# Altium PCB ADF_2nd_LO_board.PcbDoc
Units mm, origin at the board's own origin, x right, y up, seen from the top; angles counter-clockwise.
Board outline 50.01 x 49.63 mm, 2 copper layers (Top Layer, Bottom Layer); 28 components, 12 nets, 57 pads, 44 vias.
Unrouted connection lines stored in the file: 3.
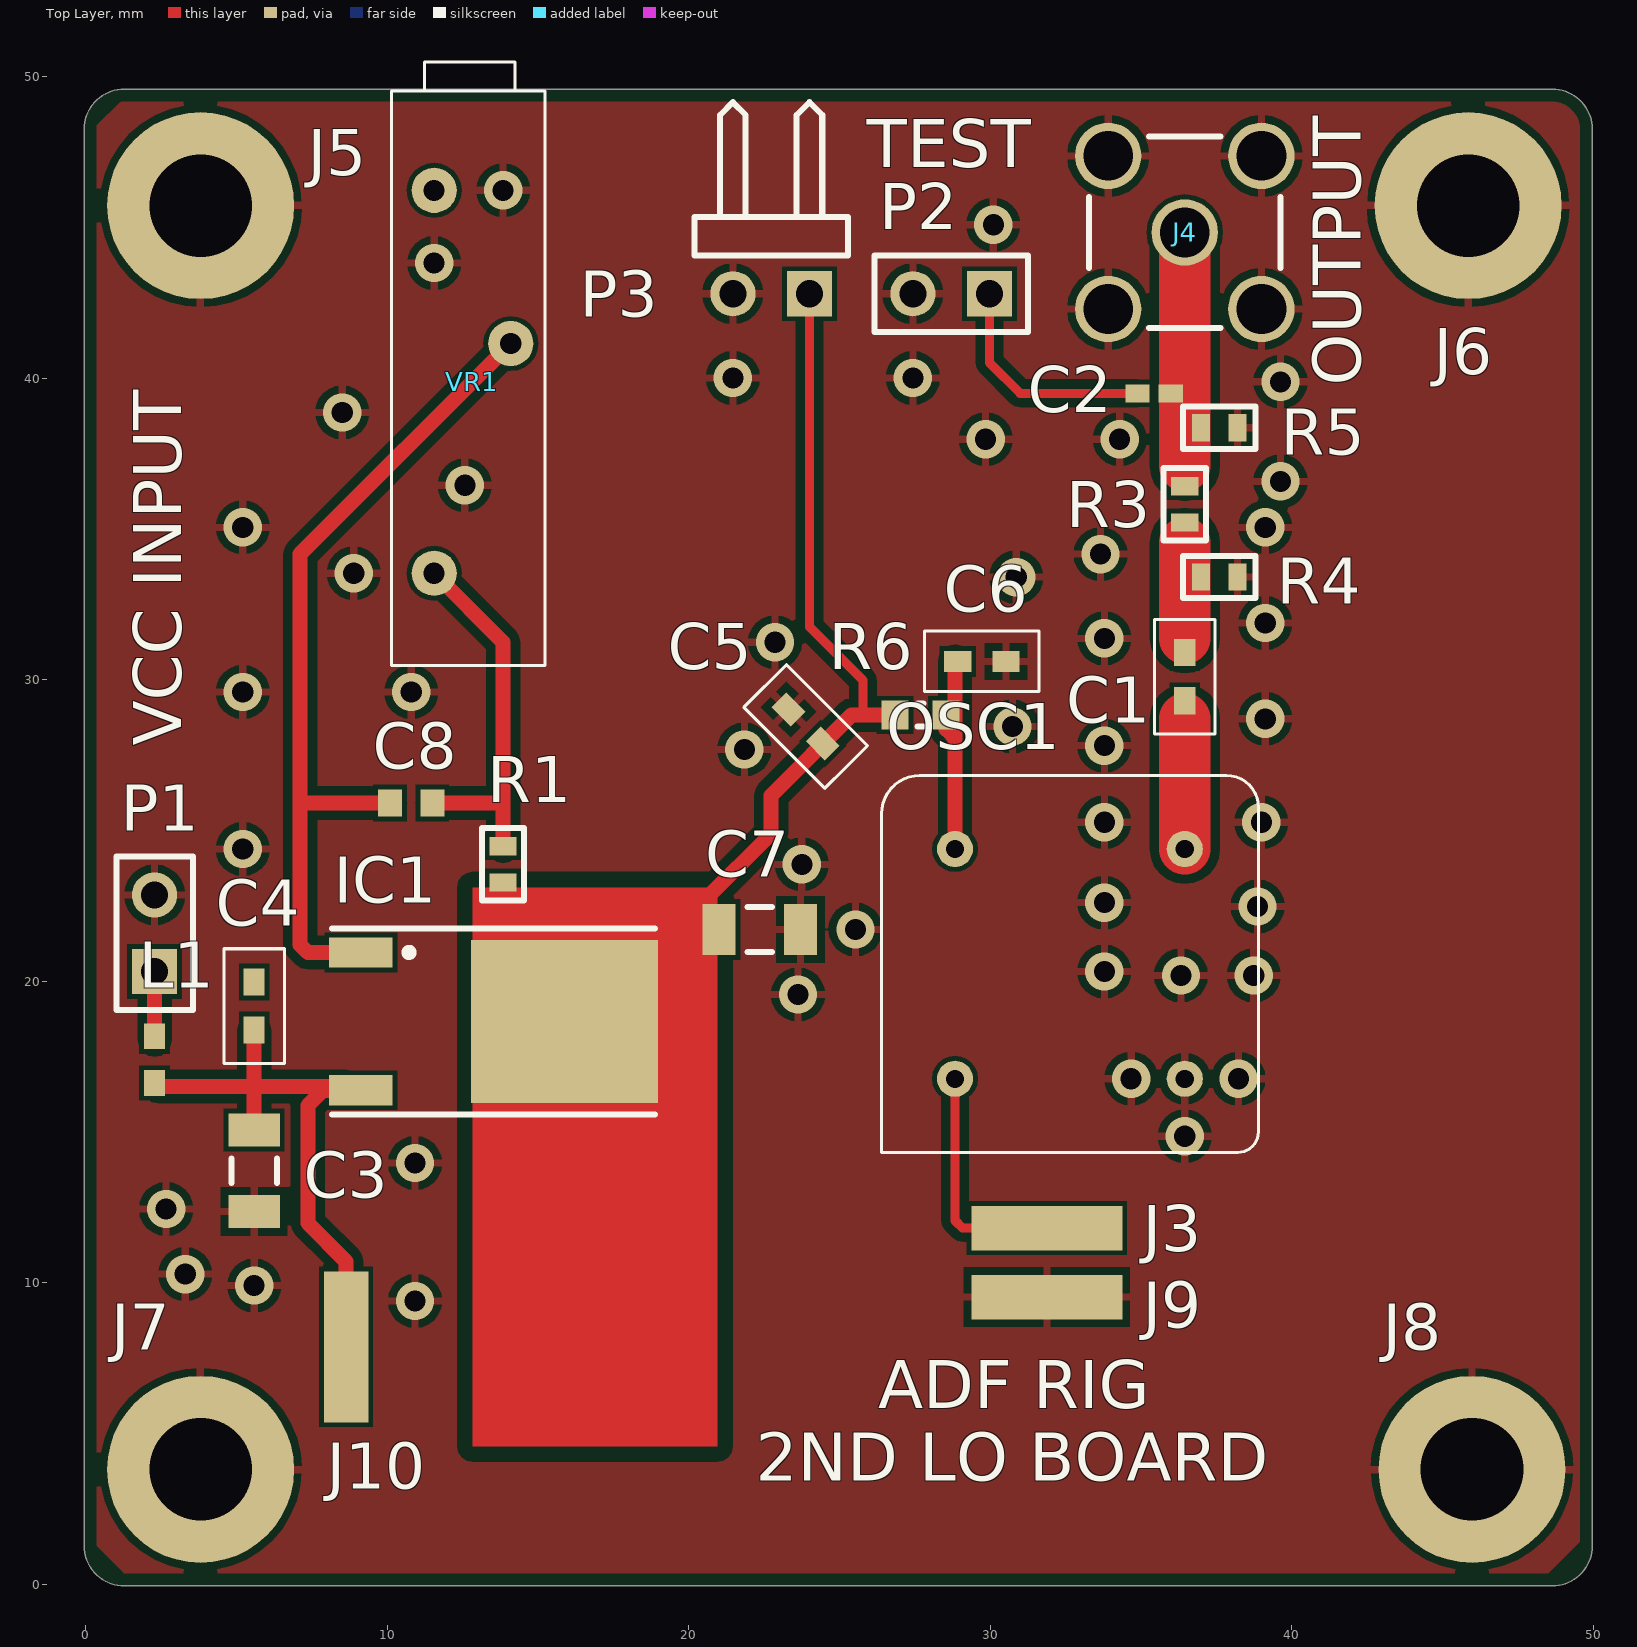
[diagram p0: Top Layer view]
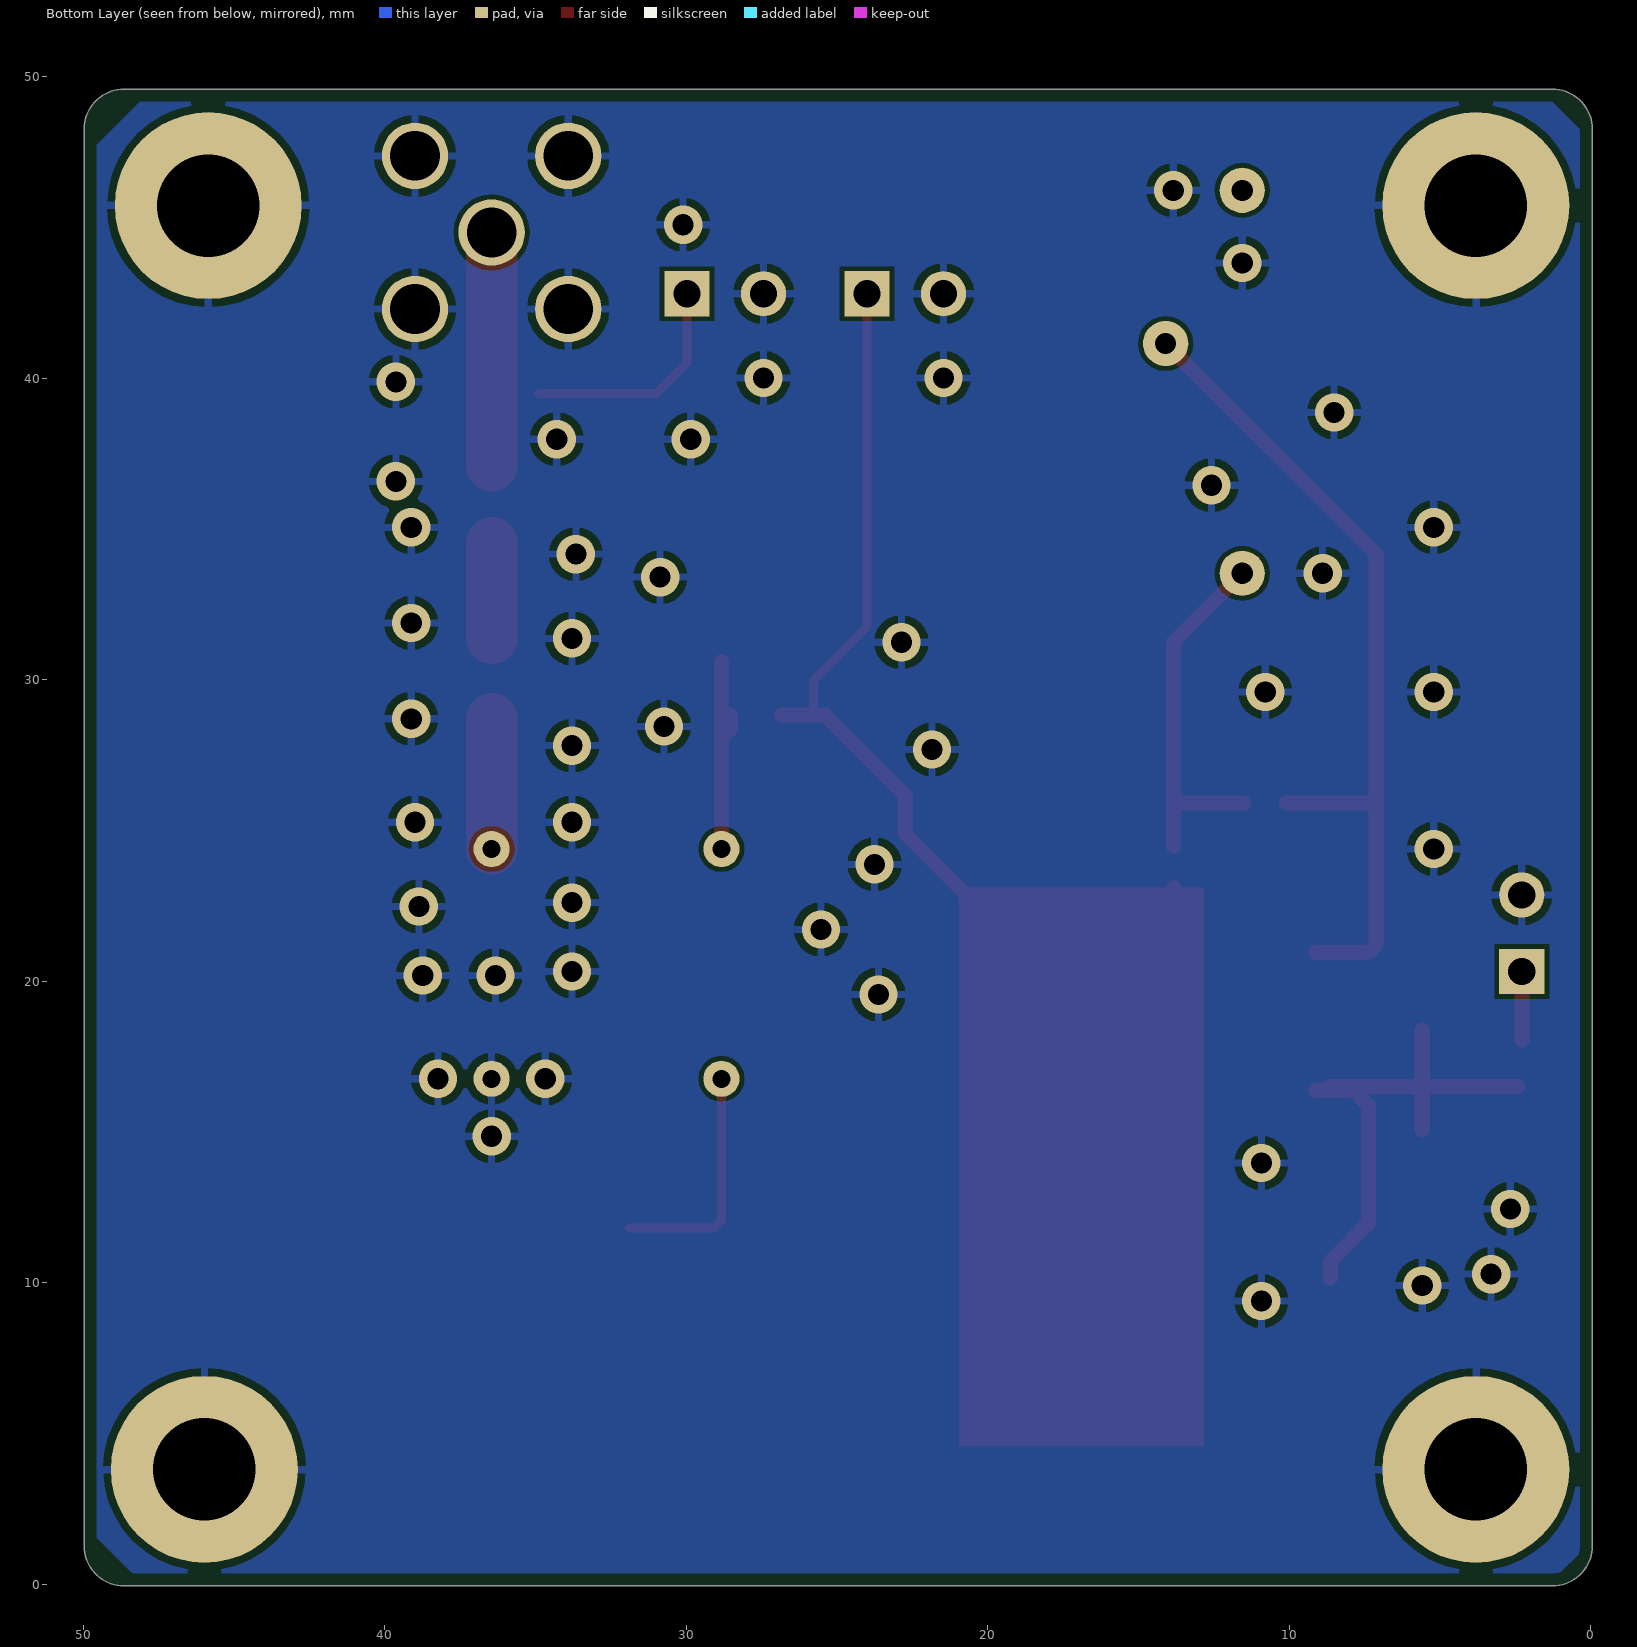
[diagram p1: Bottom Layer view, seen from below]

## Layer stack, top to bottom
Top Solder: solder mask 0.0102, Solder Resist, Dk 3.5
Top Layer: signal copper 0.0356
Dielectric 1: dielectric 0.32, FR-4, Dk 4.8
Bottom Layer: signal copper 0.0356
Bottom Solder: solder mask 0.0102, Solder Resist, Dk 3.5

## Board outline
-0.05,1.27 -0.05,48.26 cw(c1.27,48.26) 1.27,49.58 48.641,49.58 cw(c48.641,48.26) 49.961,48.26 49.961,1.27 cw(c48.641,1.27) 48.641,-0.05 1.27,-0.05 cw(c1.27,1.27)

## Design rules (kind name [scope] priority, off if disabled: settings)
BoardOutlineClearance [All] p1: gap=0.41 ignorepadtopadclearanceinfootprint=FALSE except(0: Arc-SplitContinuation Track-SplitContinuation SMDPad-SplitContinuation THPad-SplitContinuation Via-SplitContinuation Fill-SplitContinuation Poly-SplitContinuation Region-SplitContinuation Text-SplitContinuation)
Clearance [All] p1: gap=0.152 ignorepadtopadclearanceinfootprint=FALSE except(0: Arc-Hole Track-Hole SMDPad-Hole THPad-Hole Via-Hole Fill-Hole Poly-Hole Region-Hole Text-Hole; 0.178: Arc-Text Track-Text SMDPad-Text THPad-Text Via-Text Fill-Text Poly-Text Region-Text; 0.3: Arc-Fill Arc-Poly Arc-Region Track-Fill Track-Poly Track-Region; 0.5: Fill-Fill Fill-Poly Fill-Region Poly-Poly Poly-Region Region-Region)
HoleSize [All] p1: absolutevalues=TRUE maxlimit=6.35 minlimit=0.3 maxpercent=80.000 minpercent=20.000
HoleToHoleClearance [All] p1: gap=0.16 allowstackedmicrovias=TRUE
MinimumAnnularRing [All] p1: minimumring=0.16
MinimumSolderMaskSliver [All] p1: minsoldermaskwidth=0.1
PolygonConnect [All] p1: connectstyle=Relief reliefconductorwidth=0.254 reliefentries=4 polygonreliefangle="90 Angle" airgapwidth=0.254
RoomDefinition ADF_2nd_LO_board [InComponentClass('ADF_2nd_LO_board')] p1: confinementstyle=ConfineIn formatcopy=TRUE lockcomponents=FALSE outline 51.054,1.524 64.262,1.524 64.262,4.191 51.054,4.191
RoutingVias [All] p1: holewidth=0.711 width=1.27 viastyle="Through Hole" minholewidth=0.711 minwidth=1.27 maxholewidth=0.711 maxwidth=1.27
SMDEntry [All] p1: side=TRUE corner=TRUE anyangle=FALSE
SilkToSilkClearance [All] p1: silktosilkclearance=0.2
SilkToSolderMaskClearance [IsPad] p1: minsilkscreentomaskgap=0.13 clearancetoexposedcopper=TRUE
SolderMaskExpansion [All] p1: expansion=0.102
Width [All] p1: maxlimit=2 minlimit=0.152 preferedwidth=0.2
25 further rules are at their usual default settings.

## Components (designator, comment, footprint, x,y, rotation, side; value= is the part's Value field where it differs from the comment)
C1 "10nF 0603 NP0" C0603_murata 36.449,30.099 r90 top
C2 "Capacitor" CAPC1005X04N_0402 35.433,39.497 r180 top value=15p
C3 "Cap Semi" C1206 5.588,13.716 r90 top value=22uF
C4 "10nF 0603 NP0" C0603_murata 5.588,19.177 r90 top
C5 "10nF 0603 NP0" C0603_murata 23.876,28.448 r135 top
C6 "10nF 0603 NP0" C0603_murata 29.718,30.607 r0 top
C7 "Cap Semi" C1206 22.352,21.717 r180 top value=22uF
C8 "Cap Semi" 1608[0603] 10.795,25.908 r0 top value=10nF
IC1 "Voltage Regulator" TO-252 12.5,18.669 r270 top value=LM1117DT-ADJ
J3 "pad_smd" pad_smd_bodge 31.877,11.811 r180 top
J4 "32K201-400L5" ROS-32K201-400L5_V 36.449,44.831 r0 top
J5 "Hole M3" HOLE_M3 3.81,45.72 r0 top value=Hole
J6 "Hole M3" HOLE_M3 45.847,45.72 r0 top value=Hole
J7 "Hole M3" HOLE_M3 3.81,3.81 r0 top value=Hole
J8 "Hole M3" HOLE_M3 45.974,3.81 r0 top value=Hole
J9 "pad_smd" pad_smd_bodge 31.877,9.525 r180 top
J10 "pad_smd" pad_smd_bodge 8.636,7.874 r90 top
L1 "742792608" SMD-0603 2.286,17.399 r90 top
OSC1 "125MHz" DIP-8_osc 32.639,20.574 r0 top
P1 "Header 2" HDR1X2 2.286,20.32 r90 top
P2 "Header 2" HDR1X2 29.972,42.799 r180 top
P3 "Header 2H" HDR1X2H 24.003,42.799 r180 top
R1 "120R 0603" R0603 13.843,23.876 r90 top value=120
R3 "18R 0603" R0603 36.449,35.814 r270 top value=10
R4 "300R 0603" R0603 37.592,33.401 r0 top value=10
R5 "300R 0603" R0603 37.592,38.354 r180 top value=10
R6 "Resistor" RESC1608X06N_0603 27.686,28.829 r0 top value=0R
VR1 "Multiturn trim pot" "Multiturn trimpot flat long" 15.237,30.478 r90 top

## Footprints (in the part's own frame and the unit in brackets; to place one, negate y for a bottom-side part, rotate by r counter-clockwise, add the part's x,y. Pads: shape width x height; smd on the part's side, far side on the other; paste and mask are expansions set on the pad)
1608[0603] [mm] "Chip Capacitor, Body 1.6x0.8mm, IPC High Density"
  rect 0.8x0.9 smd: 1(-0.7,0) 2(0.7,0)
  body extent -0.87,-0.48 0.87,0.48, height 1.3
C0603_murata [mm]
  rect 0.9x0.7 smd: 1(-0.8,0) 2(0.8,0)
  silkscreen extent -1.9,-1 1.9,1
C1206 [mm] "Chip Capacitor, Body 3.2x1.6mm, IPC High Density"
  rect 1.1x1.7 smd: 1(-1.35,0) 2(1.35,0)
  silkscreen extent -0.4,-0.75 0.4,0.75, body extent -1.7,-0.9 1.7,0.9, height 1.3
CAPC1005X04N_0402 [mm] "Chip Capacitor, 2-Leads, Body 1,00x0,50mm, IPC Medium Density"
  rect 0.8x0.6 smd: 1(-0.55,0) 2(0.55,0)
  body extent -0.52,-0.28 0.53,0.27, height 0.4
DIP-8_osc [mm] "DIP-8 crystal oscillator"
  round 1.2 hole 0.6: 1(-3.81,-3.81) 4(3.81,-3.81) 5(3.81,3.81) 8(-3.81,3.81)
  silkscreen extent -6.25,-6.25 6.25,6.25, body extent -6.35,-6.35 6.35,6.35, height 4.6
HDR1X2 [mm] "Connector; Header; 2 Position"
  rect 1.5x1.5 hole 0.9: 1(0,0)
  round 1.5 hole 0.9: 2(2.54,0)
  silkscreen extent -1.27,-1.27 3.81,1.27
HDR1X2H [mm] "Connector; Header; 2 Position; Right Angle"
  rect 1.5x1.5 hole 0.9: 1(0,0)
  round 1.5 hole 0.9: 2(2.54,0)
  silkscreen extent -1.27,-6.35 3.81,-1.27
HOLE_M3 [mm] "Hole for M3 screw"
  round 6.2 hole 3.4 mask+0.102: 1(0,0)
"Multiturn trimpot flat long" [mm] "Multiturn potentiometer of the long and flat variety"
  round 1.5 hole 0.7: 1(3.05,3.68) 2(10.67,1.14) 3(15.75,3.68)
  silkscreen extent 0,0 20,5.1, body extent 0.01,0.3 20.59,5.13, height 6.6
pad_smd_bodge [mm] "A surface only pad for future bodge-wires"
  rect 5x1.473 smd: 1(0,0)
R0603 [mm]
  rect 0.6x0.9 smd: 1(-0.6,0) 2(0.6,0)
  silkscreen extent -1.2,-0.7 1.2,0.7
RESC1608X06N_0603 [mm] "Chip Resistor, 2-Leads, Body 1,60x0,80mm, IPC Medium Density"
  rect 0.9x0.95 smd: 1(-0.85,0) 2(0.85,0)
  silkscreen extent -0.1,-0.38 0.1,0.38, body extent -0.85,-0.45 0.85,0.45, height 0.55
ROS-32K201-400L5_V [mm] "SMA Right Angle Jack, 14.8x6.35x9.6mm, Rosenberger Recommended"
  round 2.2 hole 1.65: 1(0,0) MH(-2.54,-2.54) MH(-2.54,2.54) MH(2.54,-2.54) MH(2.54,2.54)
  silkscreen extent -3.17,-3.17 3.17,3.17, body extent -3.17,-3.17 3.17,11.62, height 9.6
SMD-0603 [mm]
  rect 0.85x0.7 smd: 1(-0.775,0) 2(0.775,0)
  body extent -0.8,-0.4 0.8,0.4, height 0.79
TO-252 [mm] "D-PAK/TO-252-AA; 3 Leads (1 Cropped); Body 10.1 (inc. leads) x 6.6 mm (LxW max)"
  rect 1x2.1 smd: 1(-2.285,-3.375) 3(2.285,-3.375)
  round 0 smd paste+0 mask+0: 2(0,0)
  rect 5.4x6.2 smd: 4(0,3.375)
  silkscreen extent -3.09,-4.32 3.09,6.38

## Part data
C1: "10nF 0603 NP0 muRata", Capacitance=470pF, Case/Package=0603, Case Code (Metric)=1608, Dielectric=C0G, Manufacturer 1=Murata, Manufacturer Part Number 1=GRM1885C1H103JA01D, Max Operating Temperature=125°C, Min Operating Temperature=-55°C, Package Quantity=4000, Supplier Part Number 1=81-GRM1885C1H103JA1D, Tolerance=5%, Voltage=50V, Case Code (Imperial)=0603, ComponentLink1Description=https://datasheet.ciiva.com/41860/partnumbering-e-01-41860759.pdf, ComponentLink1URL=https://datasheet.ciiva.com/41860/partnumbering-e-01-41860759.pdf, ComponentLink2Description=https://datasheet.ciiva.com/29537/partnumbering-e-01-29537910.pdf, ComponentLink2URL=https://datasheet.ciiva.com/29537/partnumbering-e-01-29537910.pdf, Depth=0.8mm, Height=0.8mm, Lead Free="Lead Free", Lead Pitch=0.5mm, Length=1.6mm, Material=Ceramic, Packaging="Tape and Reel", Pricing 1="1=0.13, 10=0.05, 50=0.05, 100=0.035, 1000=0.024, 10000=0.016 (USD)", REACH SVHC="No SVHC", Stock 1=5, Supplier 1=Mouser, Termination=SMD/SMT, Thickness=0.035inch, Voltage Rating=50V, Voltage Rating (DC)=50V, Width=0.8mm
C2: library part Capacitor_15p_0402_C0G, "Class 1 SMD Capacitor", Manufacturer=AVX, ManufacturerRef=04025A150JAT2A, PowerRating=N.A., TemperatureCoeff="0ppm/°C ± 30ppm/°C", Tolerance="± 5%", Voltage=50V, OrderCode=1327631RL, PackageDescription=SMD, PackageReference=SMD-0402, PriceEuro=0.022, Published=15.5.2014, Publisher=atr, Seller=Farnell, Type="C0G / NP0"
C3 C7 C8: "Capacitor (Semiconductor SIM Model)", LatestRevisionDate=29-May-2009, LatestRevisionNote="IPC-7351 Footprint Added.", PackageDescription="Chip Capacitor", PackageReference=C1206, Published=8-Jun-2000, Publisher="Altium Limited"
C4 C5 C6: "10nF 0603 NP0 muRata", Capacitance=100nF, Case/Package=0603, Case Code (Metric)=1608, Dielectric=C0G, Manufacturer 1=Murata, Manufacturer Part Number 1=GRM1885C1H103JA01D, Max Operating Temperature=125°C, Min Operating Temperature=-55°C, Package Quantity=4000, Supplier Part Number 1=81-GRM1885C1H103JA1D, Tolerance=5%, Voltage=50V, Case Code (Imperial)=0603, ComponentLink1Description=https://datasheet.ciiva.com/41860/partnumbering-e-01-41860759.pdf, ComponentLink1URL=https://datasheet.ciiva.com/41860/partnumbering-e-01-41860759.pdf, ComponentLink2Description=https://datasheet.ciiva.com/29537/partnumbering-e-01-29537910.pdf, ComponentLink2URL=https://datasheet.ciiva.com/29537/partnumbering-e-01-29537910.pdf, Depth=0.8mm, Height=0.8mm, Lead Free="Lead Free", Lead Pitch=0.5mm, Length=1.6mm, Material=Ceramic, Packaging="Tape and Reel", Pricing 1="1=0.13, 10=0.05, 50=0.05, 100=0.035, 1000=0.024, 10000=0.016 (USD)", REACH SVHC="No SVHC", Stock 1=5, Supplier 1=Mouser, Termination=SMD/SMT, Thickness=0.035inch, Voltage Rating=50V, Voltage Rating (DC)=50V, Width=0.8mm
IC1: library part LM1117DT-ADJ, "TEXAS INSTRUMENTS  LM1117DT-ADJ  V REG ADJ +1.25/13.8V, 1117, DPAK-3", Manufacturer="TEXAS INSTRUMENTS", PowerRating=-, Voltage="1.25V - 13.8V", LatestRevisionDate=1.9.2014, LatestRevisionNote=Created, ManufacturerRef=LM1117DT-ADJ, OrderCode=9486267, PackageDescription=TO-252, PackageReference=TO-252, PriceEuro=0.84, Published=1.9.2014, Publisher=atr, Seller=Farnell, TemperatureCoeff=-, Tolerance=-, Type=LM1117DT-ADJ
J3 J9 J10: library part pad_smd_1mm*2mm, "1mm * 2mm smd pad"
J4: "SMA Right Angle Jack, Up to 18 GHz, -65 to 165 degC", ComponentLink1Description="Manufacturer URL", ComponentLink1URL=http://www.rosenberger.de, ComponentLink2Description=Datasheet, ComponentLink2URL=http://rosenberger.de/ok/images/documents/db/32K201-400L5.pdf, ComponentLink3Description="Package Specification", ComponentLink3URL=http://rosenberger.de/ok/images/documents/db/32K201-400L5.pdf, ComponentLink4Description="Series Overview / Design Note", ComponentLink4URL=http://rosenberger.de/ok/images/documents/spez/32.pdf, ComponentLink5Description="Webshop / RFQ", ComponentLink5URL=http://www.rosenberger.com/en/contact/sales/, DatasheetVersion=a00, Design Note="Footprint in library is a generic example - only application specific footprint delivers High Performance", Mounting Technology="Through Hole", PackageDescription="SMA Right Angle Jack, 14.8 x 6.35 x 9.6 mm", PackageReference=32K201-400L5, PackageVersion=a00, PartNumber=32K201-400L5
J5 J6 J7 J8: library part HoleM3, "HoleM3", Manufacturer=-, PowerRating=N.A., LatestRevisionDate=21.5.2014, ManufacturerRef=-, OrderCode=-, PackageDescription=-, PackageReference=-, PriceEuro=-, Publisher=atr, Seller=-, TemperatureCoeff=N.A., Tolerance=N.A., Type=Hole, Voltage=N.A.
L1: "SMD EMI Suppression Ferrite Bead WE-CBF, Z = 47 Ohm", DC_Resistance=0R1, ComponentLink1Description="Manufacturer URL", ComponentLink1URL=http://www.we-online.com, ComponentLink2Description=Datasheet, ComponentLink2URL=http://www.we-online.de/katalog/media/pdf/742792608.pdf, DatasheetVersion=Dec-2005, Impedance="47 Ohm", OrderCode=1635681RL, PackageDescription="Chip Inductor, 2-Leads, Body 1.6 x 0.8 mm", PackageReference=SMD-0603, PackageVersion=2009, Seller=Farnell
OSC1: library part "OSC DIP-8 125MHz 3.3V TTL", "DIP Oscillator", Supply VOltage=3.3VDC, Frequency=125MHz, Output="3.3V TTL", Publisher=ftg, Seller=eBay
P1 P2: "Header, 2-Pin", LatestRevisionDate=17-Jul-2002, LatestRevisionNote="Re-released for DXP Platform.", Publisher="Altium Limited"
P3: "Header, 2-Pin, Right Angle", LatestRevisionDate=17-Jul-2002, LatestRevisionNote="Re-released for DXP Platform.", Publisher="Altium Limited"
R1: library part "0603 120R", Full Power Rating Temperature=70, Manufacturer="YAGEO (PHYCOMP)", ManufacturerRef=RC0603FR-07120RL, Operating Temperature Max=155, Operating Temperature Min=-55, Operating Temperature Range="-55°C to +155", Power Rating=63, Resistance=330, Resistance Tolerance="± 1%", Resistor Case Style=0603, Resistor Element Material="Thick Film", Resistor Mounting="Surface Mount Device", Temperature Coeff. +=100, Temperature Coefficient="± 100", Tolerance +=1%, Voltage Rating=50, Voltage Rating V DC=50V, ComponentLink1Description=http://www.farnell.com/datasheets/1788326.pdf, ComponentLink1URL=http://www.farnell.com/datasheets/1788326.pdf, ComponentLink2Description=http://www.farnell.com/cad/1561168.zip, ComponentLink2URL=http://www.farnell.com/cad/1561168.zip, ComponentLink3Description=http://www.farnell.com/datasheets/1868787.pdf, ComponentLink3URL=http://www.farnell.com/datasheets/1868787.pdf, ComponentLink4Description=http://www.farnell.com/cad/1555190.zip, ComponentLink4URL=http://www.farnell.com/cad/1555190.zip, External Depth=0.45, External Length / Height=1.6, External Width=0.8, MSL=-, No. of Pins=2, OrderCode=9238379, Packaging="Cut Tape", Pricing 1="10=0.0129, 100=0.0067, 500=0.0057, 1000=0.005, 2500=0.004, 5000=0.0033, 25000=0.0017, 50000=0.0014 (EUR)", Product Range="MC Series", Publisher=iv, Reel Quantity=5000, RoHS=Y-EX, Seller=Farnell, Stock 1=50929, SVHC="No SVHC (17-Dec-2015)", Tape Width=8, Temperature Coeff. -=100, Tolerance -=1%
R3 R4 R5: library part "0603 10R", "10R 0603", Manufacturer=MULTICOMP, ManufacturerRef=MC0063W0603510R, Operating Temperature Max=155, Operating Temperature Min=-55, Operating Temperature Range="-55°C to +155", Power Rating=63, Resistance=10, Resistance Tolerance="± 1%", Resistor Case Style="0603 [1608 Metric]", Resistor Element Material="Thick Film", Resistor Mounting="Surface Mount Device", Temperature Coeff. +=100, Temperature Coefficient="± 100", Tolerance +=1%, Voltage Rating=50, Voltage Rating V DC=50V, ComponentLink1Description=http://www.farnell.com/datasheets/1788326.pdf, ComponentLink1URL=http://www.farnell.com/datasheets/1788326.pdf, External Depth=0.45, External Length / Height=1.6, External Width=0.8, MSL=-, No. of Pins=2, OrderCode=9331670, Packaging="Cut Tape", Pricing 1="10=0.0099, 100=0.0086, 500=0.0072, 1000=0.0056, 2500=0.0042, 5000=0.0034, 25000=0.0017, 50000=0.0014 (EUR)", Product Range="MC Series", Publisher=iv, Reel Quantity=5000, RoHS=Y-EX, Seller=Farnell, Stock 1=70916, Supplier 1=Farnell, Tape Width=8, Temperature Coeff. -=100, Tolerance -=1%
R6: library part Resistor_0R_0603_Bulk, "Bulk SMD Resistor", Manufacturer=PANASONIC, ManufacturerRef=ERJ3GEY0R00V, PowerRating=100mW, TemperatureCoeff="± 200ppm/°C", Tolerance=-, Voltage=75V, OrderCode=2059527RL, PackageDescription=SMD, PackageReference=SMD-0603, PriceEuro=0.005, Published=15.5.2014, Publisher=atr, Seller=Farnell, Type="Thick Film"

## Via types
v1: diameter 1.27, hole 0.7, Top Layer to Bottom Layer, 44 vias

## Nets (pads, with @x,y where several pads share a name; then routed paths per layer and width w, separated by ;. In a path a pad name is that pad's centre, name@x,y a point inside that pad or via, vN(x,y) a via of type N, cw(c..) or ccw(c..) an arc to the next point about the centre after c; other vN are vias at no path point)
3.3V: C5.1 C7.2 IC1.2 IC1.4 P3.1 R1.1 R6.1 | length 35.5
  Top Layer w0.3: P3.1 24.003,36.449 24.003,31.75 25.781,29.972 25.781,28.829
  Top Layer w0.5: R1.1@13.843,23.114 13.843,21.167 13.589,20.913 13.589,20.555 15.475,18.669 IC1.4 18.975,18.669 19.102,18.796 18.99,18.796 20.475,20.28 ; 20.574,22.733 22.733,24.892 22.733,26.162 25.4,28.829 25.781,28.829 R6.1
GND: C3.1 C5.2 C6.2 C7.1 J4.MH J5.1 J6.1 J7.1 J8.1 J9.1 OSC1.4 P1.2 P2.2 P3.2 R4.2 R5.1
  other v1: 10.922,9.398 5.588,9.906 3.302,10.287 2.667,12.446 10.922,13.97 36.449,14.859 34.671,16.764 38.227,16.764 23.622,19.558 36.322,20.193 38.735,20.193 33.782,20.32 25.527,21.717 38.862,22.479 33.782,22.606 23.749,23.876 5.207,24.384 33.782,25.273 38.989,25.273 21.844,27.686 33.782,27.813 30.734,28.448 39.116,28.702 5.207,29.591 10.795,29.591 22.86,31.242 33.782,31.369 39.116,31.877 30.861,33.401 8.89,33.528 33.655,34.163 5.207,35.052 39.116,35.052 12.573,36.449 39.624,36.576 29.845,37.973 34.29,37.973 8.509,38.862 39.624,39.878 21.463,40.005 27.432,40.005 11.557,43.815 30.099,45.085 13.843,46.228
NetC1_1: C1.1 OSC1.5 | length 4.3
  Top Layer w1.7: OSC1.5 36.449,28.702
NetC1_2: C1.2 R3.2 R4.1 | length 3.2
  Top Layer w1.7: 36.449,31.369 36.449,34.544
NetC2_1: C2.1 J4.1 R3.1 R5.2 | length 7.7
  Top Layer w1.7: 36.449,37.084 J4.1
NetC2_2: C2.2 P2.1 | length 7.6
  Top Layer w0.3: P2.1 29.972,40.513 30.988,39.497 C2.2
NetC6_1: C6.1 OSC1.8 R6.2 | length 7.1
  Top Layer w0.5: R6.2 28.536,28.354 28.829,28.061 ; OSC1.8 28.829,28.061 ; C6.1@28.829,30.607 28.829,28.061
NetC8_1: C8.1 IC1.1 VR1.2 | length 27.9
  Top Layer w0.5: IC1.1 7.367,20.954 7.112,21.209 7.112,25.908 ; C8.1 7.112,25.908 ; VR1.2 7.112,34.163 7.112,25.908
NetC8_2: C8.2 R1.2 VR1.1 | length 12.3
  Top Layer w0.5: C8.2 13.843,25.908 ; VR1.1 13.843,31.242 13.843,25.908 ; R1.2 13.843,25.908
NetJ3_1: J3.1 OSC1.1 | length 7.9
  Top Layer w0.3: OSC1.1 28.829,12.065 29.083,11.811 J3.1
NetL1_1: L1.1 P1.1
VCC: C3.2 C4.1 IC1.3 J10.1 L1.2 | length 17.8
  Top Layer w0.5: 2.413,16.51 5.533,16.51 ; C3.2 5.588,16.455 5.533,16.51 ; C4.1 5.588,16.565 5.533,16.51 ; J10.1@8.636,10.16 8.636,10.708 7.366,11.978 7.366,15.875 7.875,16.384 IC1.3 ; IC1.3@8.652,16.51 5.533,16.51
pads on no net: C4.2 VR1.3
copper on no net: | length 2.3
  Top Layer w0.5: 2.286,18.054 2.286,20.193 cw(c2.413,20.193) 2.413,20.32

## Polygon pours and split planes (outlines as drawn)
GND on Bottom Layer "Bottom Layer-GND" (solid, pour order 2): 1.397,0 0,1.397 0,47.879 1.651,49.53 1.651,49.657 47.625,49.657 49.657,47.625 50.038,47.625 50.038,2.032 48.006,0 1.651,0 1.524,0.127
GND on Top Layer "Top Layer-GND" (solid, pour order 0): 1.27,0 1.27,0.381 0,1.651 0,48.133 0.127,48.133 1.651,49.657 1.778,49.53 48.641,49.53 49.911,48.26 49.911,1.778 48.133,0

## Other copper
Top Layer:
  rectangle net 3.3V: 12.827,4.572 20.955,23.114

## Silkscreen, mask and mechanical layers (free items; w line width, h text height)
Top Overlay:
  text "TEST" at 25.908,46.99 h1.6
  text "OUTPUT" at 42.291,39.751 h1.6 r90
  text "VCC INPUT" at 3.175,27.813 h1.6 r90
  text "ADF RIG" at 26.289,5.842 h1.6
  text "2ND LO BOARD" at 22.225,3.429 h1.6
Mechanical 13:
  lines w0.1: 0,5.715 0,48.26 cw(c1.27,48.26) 1.27,49.53 48.641,49.53 cw(c48.641,48.26) 49.911,48.26 49.911,1.27 cw(c48.641,1.27) 48.641,0 1.27,0 cw(c1.27,1.27) 0,1.27 0,6.096
Drill Drawing:
  circle w0.254: c-11.345,83.651 r0.847
  lines w0.254: -12.192,79.417 -11.768,79.417 -11.345,78.994 -10.922,79.417 -10.498,79.417 -10.922,79.841 -10.498,80.264 -10.922,80.264 -11.345,80.687 -11.768,80.264 -12.192,80.264 -11.768,79.841 -12.192,79.417 ; -12.192,88.307 -10.498,88.307 -11.345,86.614 -12.192,88.307 ; -12.192,90.424 -10.498,90.424 -10.498,92.117 -12.192,92.117 -12.192,90.424 ; -12.192,94.234 -11.345,94.657 -10.498,94.234 -10.922,95.081 -10.498,95.927 -11.345,95.504 -12.192,95.927 -11.768,95.081 -12.192,94.234
  lines w0.381: -13.71,77.851 82.429,77.851 ; -13.71,96.901 82.429,96.901 ; 0.282,74.041 0.282,100.711 ; 13.994,74.041 13.994,100.711 ; 43.704,74.041 43.704,100.711 ; 62.342,74.041 62.342,100.711 ; -13.71,74.041 82.429,74.041 82.429,100.711 -13.71,100.711 -13.71,74.041
  text "Symbol" at -11.424,98.044 h1.83
  text "Count" at 1.425,98.044 h1.83
  text "Hole Size" at 15.137,98.044 h1.83
  text "Hole Type" at 44.847,98.044 h1.83
  text "Pad Shape" at 63.485,98.044 h1.83
  text "4" at 1.425,94.234 h1.52
  text "23,62mil (0,600mm)" at 15.137,94.234 h1.52
  text "Round" at 44.847,94.234 h1.52
  text "Rounded" at 63.485,94.234 h1.52
  text "4" at 1.425,90.424 h1.52
  text "133,86mil (3,400mm)" at 15.137,90.424 h1.52
  text "Round" at 44.847,90.424 h1.52
  text "Rounded" at 63.485,90.424 h1.52
  text "5" at 1.425,86.614 h1.52
  text "64,96mil (1,650mm)" at 15.137,86.614 h1.52
  text "Round" at 44.847,86.614 h1.52
  text "Rounded" at 63.485,86.614 h1.52
  text "6" at 1.425,82.804 h1.52
  text "35,43mil (0,900mm)" at 15.137,82.804 h1.52
  text "Round" at 44.847,82.804 h1.52
  text "(Mixed)" at 63.485,82.804 h1.52
  text "47" at 1.425,78.994 h1.52
  text "27,56mil (0,700mm)" at 15.137,78.994 h1.52
  text "Round" at 44.847,78.994 h1.52
  text "Rounded" at 63.485,78.994 h1.52
  text "66 Total" at 1.425,75.184 h1.52